# Altium PCB imu_board_r1.PcbDoc
Units mm, origin at the board's own origin, x right, y up, seen from the top; angles counter-clockwise.
Board outline 15 x 11 mm, 4 copper layers (Top Layer, Int1 (GND), Int2 (PWR), Bottom Layer), stack 1.369 mm thick; 23 components, 10 nets, 129 pads, 48 vias.
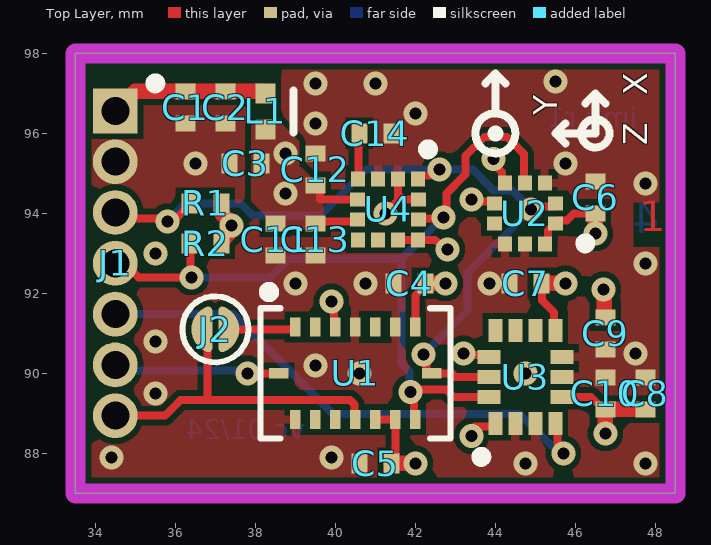
[diagram p0: Top Layer view]
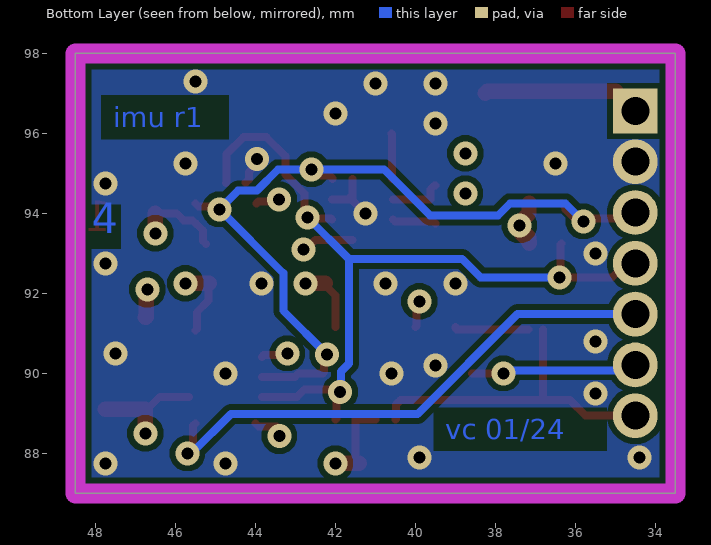
[diagram p1: Bottom Layer view, seen from below]
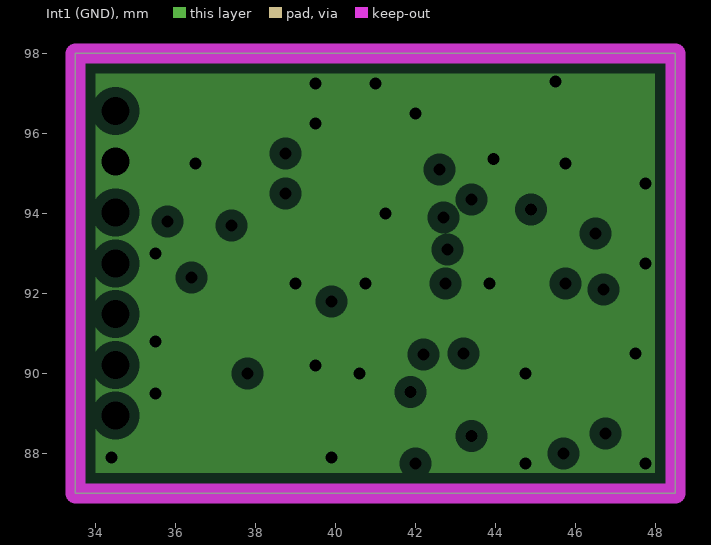
[diagram p2: Int1 (GND), clearances drawn from the general rule]
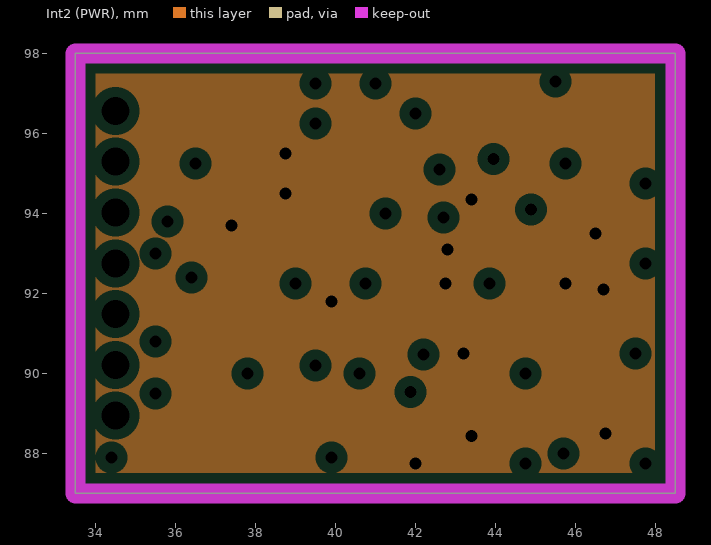
[diagram p3: Int2 (PWR), clearances drawn from the general rule]
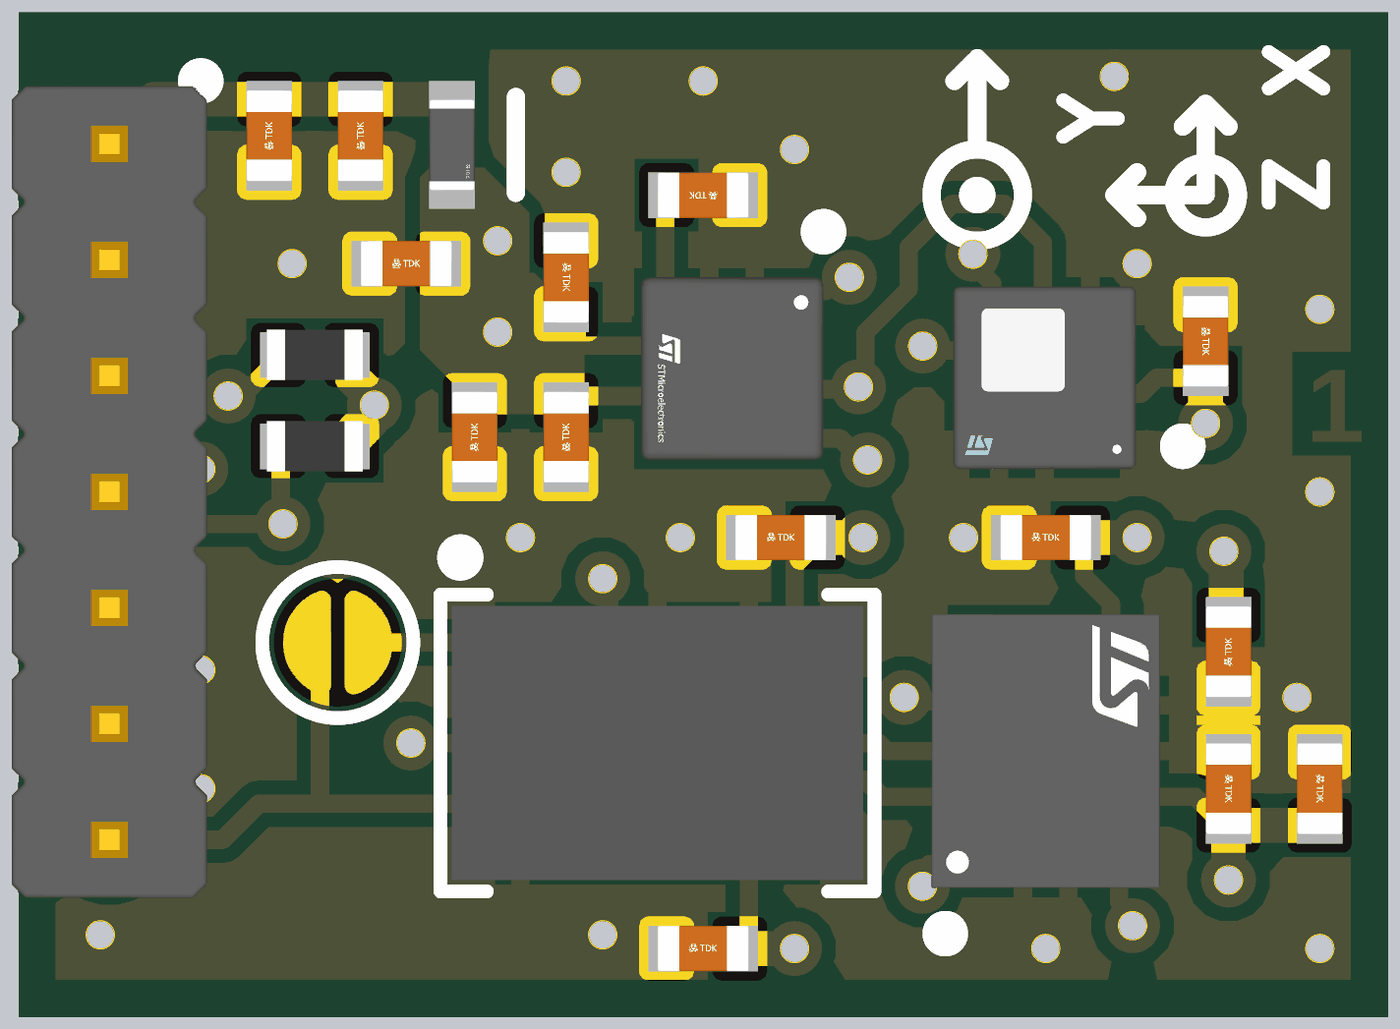
[diagram p4: 3D render of the assembled board from above, using the file's embedded part models]

## Layer stack, top to bottom
Top Solder: solder mask 0.0254, SM-001, Dk 4
Top Layer: signal copper 0.035
Dielectric 1: prepreg 0.1295, PP-017, Dk 4.3
Dielectric 2: prepreg 0.1295, PP-017, Dk 4.3
Int1 (GND): plane copper 0.035, net GND
Dielectric 3: core 0.7112, Core-039, Dk 4.8
Int2 (PWR): plane copper 0.035, net 3V3
Dielectric 4: prepreg 0.1295, PP-017, Dk 4.3
Dielectric 5: prepreg 0.1295, PP-017, Dk 4.3
Bottom Layer: signal copper 0.035
Bottom Solder: solder mask 0.0254, SM-001, Dk 4

## Board outline
33.5,87 33.5,98 48.5,98 48.5,87

## Design rules (kind name [scope] priority, off if disabled: settings)
Clearance [All] p1: gap=0.15 ignorepadtopadclearanceinfootprint=FALSE
MinimumSolderMaskSliver [All] p1: minsoldermaskwidth=0.1
PlaneClearance [All] p1: clearance=0.25
PlaneConnect [All] p1: planeconnectstyle=Direct reliefexpansion=0.508 reliefentries=4 reliefconductorwidth=0.254 reliefairgap=0.254
PolygonConnect PolygonConnect_1 [(HasFootprint('FP-HLGA-10L-DM00386636-MFG') OR HasFootprint('FP-LGA-14L-DM00249496-MFG') OR HasFootprint('FP-VFLGA-12-8365767-MFG') OR HasFootprint('QFN_BMI085_BOS'))] p1: connectstyle=Relief reliefconductorwidth=0.2 reliefentries=4 polygonreliefangle="90 Angle" airgapwidth=0.15
PolygonConnect [All] p2: connectstyle=Direct reliefconductorwidth=0.254 reliefentries=4 polygonreliefangle="90 Angle" airgapwidth=0.254
RoutingVias [All] p1: holewidth=0.3 width=0.6 viastyle="Through Hole" minholewidth=0.3 minwidth=0.6 maxholewidth=0.711 maxwidth=1.27
SilkToSilkClearance [All] p1: silktosilkclearance=0.1
SilkToSolderMaskClearance [IsPad] p1: minsilkscreentomaskgap=0.12 clearancetoexposedcopper=TRUE
SolderMaskExpansion SolderMaskExpansion_1 [IsVia] p1: expansion=0.102 istentingtop=TRUE
SolderMaskExpansion [All] p2: expansion=0.102 istentingtop=FALSE
Width [All] p1: maxlimit=1 minlimit=0.15 preferedwidth=0.254
25 further rules are at their usual default settings.

## Components (designator, comment, footprint, x,y, rotation, side; value= is the part's Value field where it differs from the comment)
C1 "10u" CAPC0402 36.25,96.65 r90 top value=10uF
C2 "10u" CAPC0402 37.25,96.65 r90 top value=10uF
C3 "10u" CAPC0402 37.75,95.25 r0 top value=10uF
C4 "1u" CAPC0402 41.85,92.25 r0 top value=1uF
C5 "100n" CAPC0402 41,87.75 r0 top
C6 "1u" CAPC0402 46.5,94.4 r270 top value=1uF
C7 "100n" CAPC0402 44.75,92.25 r0 top
C8 "1u" CAPC0402 47.75,89.5 r270 top value=1uF
C9 "100n" CAPC0402 46.75,91 r90 top
C10 "100n" CAPC0402 46.75,89.5 r270 top
C11 "1u" CAPC0402 38.5,93.35 r90 top value=1uF
C12 "100n" CAPC0402 39.5,95.1 r270 top
C13 "100n" CAPC0402 39.5,93.35 r90 top
C14 "100n" CAPC0402 41,96 r180 top
J1 "GRPB071VWVN-RC" FP-GRPB071VWVN-RC-MFG 34.5,92.75 r270 top
J2 "Solder Jumper" "Small Solder Jumper" 37,91.1 r0 top value=1
L1 "MLZ1005M1R0WT000" FP-MLZ1005-MFG 38.25,96.55 r270 top
R1 "2k2" RES0402 36.75,94.25 r0 top value=2.2kR
R2 "2k2" RES0402 36.75,93.25 r0 top value=2.2kR
U1 "BMI088" QFN_BMI085_BOS 40.5,90 r0 top
U2 "LPS22HHTR" FP-HLGA-10L-DM00386636-MFG 44.737,94 r180 top
U3 "LSM6DSRTR" FP-LGA-14L-DM00249496-MFG 44.75,89.912 r90 top
U4 "LIS3MDLTR" FP-VFLGA-12-8365767-MFG 41.317,94.1 r270 top

## Footprints (in the part's own frame and the unit in brackets; to place one, negate y for a bottom-side part, rotate by r counter-clockwise, add the part's x,y. Pads: shape width x height; smd on the part's side, far side on the other; paste and mask are expansions set on the pad)
CAPC0402 [mm]
  rect 0.4x0.5 smd paste+0: 1(-0.4,0) 2(0.4,0)
  body extent -0.5,-0.25 0.5,0.25, height 0.55
FP-GRPB071VWVN-RC-MFG [mm]
  rect 1.12x1.12 hole 0.7 paste-1000 mask+0: 1(-3.81,0)
  round 1.12 hole 0.7 paste-1000 mask+0: 2(-2.54,0) 3(-1.27,0) 4(0,0) 5(1.27,0) 6(2.54,0) 7(3.81,0)
  silkscreen extent -4.62,0.88 -4.38,1.13, body extent -4.79,-1.27 4.79,1.27, height 0.25
FP-HLGA-10L-DM00386636-MFG [mm]
  rect 0.375x0.35 smd paste+0 mask+0: 1(-0.763,0.25) 2(-0.763,-0.25) 6(0.763,-0.25) 7(0.763,0.25)
  rect 0.35x0.375 smd paste+0 mask+0: 3(-0.5,-0.763) 4(0,-0.763) 5(0.5,-0.763) 8(0.5,0.763) 9(0,0.763) 10(-0.5,0.763)
  silkscreen extent -1.64,0.63 -1.39,0.87, body extent -1,-1 1,1, height 0.8
FP-LGA-14L-DM00249496-MFG [mm]
  rect 0.575x0.35 smd paste-1000 mask+0: 1(-1.162,0.75) 2(-1.162,0.25) 3(-1.162,-0.25) 4(-1.162,-0.75) 8(1.162,-0.75) 9(1.162,-0.25) 10(1.162,0.25) 11(1.162,0.75)
  rect 0.35x0.575 smd paste-1000 mask+0: 5(-0.5,-0.913) 6(0,-0.913) 7(0.5,-0.913) 12(0.5,0.913) 13(0,0.913) 14(-0.5,0.913)
  silkscreen extent -2.12,0.97 -1.88,1.22, body extent -1.5,-1.25 1.5,1.25, height 0.86
FP-MLZ1005-MFG [mm]
  rect 0.5x0.5 smd paste+0 mask+0: 1(-0.45,0) 2(0.45,0)
  silkscreen extent -0.53,0.7 0.53,0.7, body extent -0.8,-0.38 0.8,0.38, height 0.25
FP-VFLGA-12-8365767-MFG [mm]
  rect 0.375x0.35 smd paste-0.03 mask+0: 1(-0.763,0.75) 2(-0.763,0.25) 3(-0.763,-0.25) 4(-0.763,-0.75) 7(0.763,-0.75) 8(0.763,-0.25) 9(0.763,0.25) 10(0.763,0.75)
  rect 0.35x0.375 smd paste-0.03 mask+0: 5(-0.25,-0.763) 6(0.25,-0.763) 11(0.25,0.763) 12(-0.25,0.763)
  silkscreen extent -1.62,0.88 -1.38,1.13, body extent -1,-1 1,1, height 1
QFN_BMI085_BOS [mil]
  rect 10x19 smd paste+0 mask+0: 1(-59.06,45.5) 2(-39.37,45.5) 3(-19.68,45.5) 4(0,45.5) 5(19.68,45.5) 6(39.37,45.5) 7(59.06,45.5) 9(59.06,-45.5) 10(39.37,-45.5) 11(19.68,-45.5) 12(0,-45.5) 13(-19.68,-45.5) 14(-39.37,-45.5) 15(-59.06,-45.5)
  rect 19x10 smd paste+0 mask+0: 8(75.25,0) 16(-75.25,0)
  silkscreen extent -94,-64 94,85, body extent -89,-59 89,59, height 40
RES0402 [mm]
  rect 0.4x0.5 smd paste+0: 1(-0.4,0) 2(0.4,0)
  body extent -0.53,-0.27 0.52,0.28, height 0.4
"Small Solder Jumper" [mm] "Small Solder Jumper (shortcut with a drop of tin if needed)"
  round 0.525 smd paste-5 mask+0: 1(-0.337,0) 2(0.337,0)
  oval 0.52x0.63 smd paste-5 mask+0: 1(-0.335,0) 2(0.335,0)
  oval 0.51x0.71 smd paste-5 mask+0: 1(-0.33,0) 2(0.33,0)
  oval 0.5x0.76 smd paste-5 mask+0: 1(-0.325,0) 2(0.325,0)
  oval 0.49x0.8 smd paste-5 mask+0: 1(-0.32,0) 2(0.32,0)
  oval 0.475x0.84 smd paste-5 mask+0: 1(-0.312,0) 2(0.312,0)
  oval 0.465x0.865 smd paste-5 mask+0: 1(-0.308,0) 2(0.308,0)
  oval 0.45x0.897 smd paste-5 mask+0: 1(-0.3,0) 2(0.3,0)
  oval 0.425x0.943 smd paste-5 mask+0: 1(-0.288,0) 2(0.288,0)
  oval 0.4x0.981 smd paste-5 mask+0: 1(-0.275,0) 2(0.275,0)
  oval 0.375x1.013 smd paste-5 mask+0: 1(-0.262,0) 2(0.262,0)
  oval 0.35x1.04 smd paste-5 mask+0: 1(-0.25,0) 2(0.25,0)
  oval 0.325x1.063 smd paste-5 mask+0: 1(-0.238,0) 2(0.238,0)
  oval 0.3x1.082 smd paste-5 mask+0: 1(-0.225,0) 2(0.225,0)
  oval 0.275x1.098 smd paste-5 mask+0: 1(-0.212,0) 2(0.212,0)
  oval 0.25x1.112 smd paste-5 mask+0: 1(-0.2,0) 2(0.2,0)
  oval 0.225x1.125 smd paste-5 mask+0: 1(-0.188,0) 2(0.188,0)
  oval 0.2x1.137 smd paste-5 mask+0: 1(-0.175,0) 2(0.175,0)
  silkscreen extent -0.82,-0.83 0.83,0.83

## Part data
C1 C2 C3: library part cap0402, "Ceramic Capacitor, Multilayer, Ceramic, 10V, 20% +Tol, 20% -Tol, X5R, 15% TC, 10uF, Surface Mount, 0402", Capacitor Type=Ceramic, Case/Package=0402, Manufacturer=Samsung, Manufacturer Part Number=CL05A106MP5NUNC, Max Operating Temperature=85°C, Min Operating Temperature=-55°C, Package Shape=Rectangular, Package Style=SMTMeter, Rated DC Voltage (URdc)=10V, Supplier Part Number=1276-1450-1-ND, Temperature Characteristics Code=X5R, Tolerance  (fill in as +-)=20%, Category="Ceramic Capacitors", ComponentLink1Description=https://datasheet.ciiva.com:443/pdfs/VipMasterIC/IC/SEMS/SEMS-S-A0008384515/SEMS-S-A0008872829-1.pdf?src-supplier=IHS+Markit, ComponentLink1URL=https://datasheet.ciiva.com:443/pdfs/VipMasterIC/IC/SEMS/SEMS-S-A0008384515/SEMS-S-A0008872829-1.pdf?src-supplier=IHS+Markit, Dielectric Material=Ceramic, Height=0.7mm, JESD-609 Code=e3, Length=1mm, Mounting Technology="Surface Mount", Multilayer=Yes, Packaging="Tape and Reel", Pins=2, Pricing="1=0.18, 10=0.115, 50=0.0726, 100=0.058, 500=0.04192, 1000=0.03708, 2500=0.03546, 5000=0.03224 (USD)", Reach SVHC Compliant=Yes, RoHS=Yes, RoHS Compliant=Yes, Stock=2505826, Supplier=Digikey, Terminal Finish=Nickel, Termination=Wraparound, Tolerance (fill in as +-)=20%, Width=0.5mm
C4 C6 C8 C11: library part cap0402, "Ceramic Capacitor, Multilayer, Ceramic, 25V, 20% +Tol, 20% -Tol, X5R, 15% TC, 1uF, Surface Mount, 0402", Capacitor Type=Ceramic, Case/Package=0402, Manufacturer="Taiyo Yuden", Manufacturer Part Number=TMK105BJ105MV-F, Max Operating Temperature=85°C, Min Operating Temperature=-55°C, Package Shape=Rectangular, Package Style=SMTMeter, Rated DC Voltage (URdc)=25V, Supplier Part Number=1843748, Temperature Characteristics Code=X5R, Tolerance  (fill in as +-)=20%, Category="Ceramic Capacitors", ComponentLink1Description=https://datasheet.ciiva.com:443/pdfs/VipMasterIC/IC/TAIY/TAIY-S-A0009103435/TAIY-S-A0009102669-1.pdf?src-supplier=IHS+Markit, ComponentLink1URL=https://datasheet.ciiva.com:443/pdfs/VipMasterIC/IC/TAIY/TAIY-S-A0009103435/TAIY-S-A0009102669-1.pdf?src-supplier=IHS+Markit, ComponentLink2Description=https://datasheet.ciiva.com/11596/tmk105bj105mv-f-ss-11596466.pdf?src-supplier=Avnet, ComponentLink2URL=https://datasheet.ciiva.com/11596/tmk105bj105mv-f-ss-11596466.pdf?src-supplier=Avnet, ComponentLink3Description=https://datasheet.ciiva.com/30154/128tmk105bj105mv-f-30154639.pdf?src-supplier=Onlinecomponents.com, ComponentLink3URL=https://datasheet.ciiva.com/30154/128tmk105bj105mv-f-30154639.pdf?src-supplier=Onlinecomponents.com, ComponentLink4Description=https://datasheet.ciiva.com/15922/tmk105bj105mv-f-pdf-15922317.pdf?src-supplier=Onlinecomponents.com, ComponentLink4URL=https://datasheet.ciiva.com/15922/tmk105bj105mv-f-pdf-15922317.pdf?src-supplier=Onlinecomponents.com, ComponentLink5Description=https://datasheet.ciiva.com/13404/mlcc-all-e-541559-13404206.pdf?src-supplier=Mouser, ComponentLink5URL=https://datasheet.ciiva.com/13404/mlcc-all-e-541559-13404206.pdf?src-supplier=Mouser, Dielectric Material=Ceramic, Height=0.5mm, JESD-609 Code=e3, Length=1mm, Mounting Technology="Surface Mount", Multilayer=Yes, Packaging="Tape and Reel", Pins=2, Pricing="200=0.05600, 600=0.05000, 1000=0.03900 (CHF)", Reach SVHC Compliant=Yes, RoHS=Yes, RoHS Compliant=Yes, Stock=2400, Supplier=Rs, Terminal Finish=Nickel, Termination=Wraparound, Tolerance (fill in as +-)=20%, Width=0.5mm
C5 C7 C9 C10 C12 C13 C14: library part cap0402, "Ceramic Capacitor, Multilayer, Ceramic, 50V, 10% +Tol, 10% -Tol, X5R, 15% TC, 0.1uF, Surface Mount, 0402", Capacitance=100nF, Capacitor Type=Ceramic, Manufacturer=Yageo, Manufacturer Part Number=CC0402KRX5R9BB104, Max Operating Temperature=85°C, Min Operating Temperature=-55°C, Negative Tolerance=10%, Package Shape=Rectangular, Package Style=SMTMeter, Rated DC Voltage (URdc)=50V, Supplier Part Number 1=3366442, Temperature Characteristics Code=X5R, Category="Ceramic Capacitors", ComponentLink1Description=https://datasheet.ciiva.com:443/pdfs/VipMasterIC/IC/YAGO/YAGO-S-A0006851646/YAGO-S-A0006851646-1.pdf?src-supplier=IHS+Markit, ComponentLink1URL=https://datasheet.ciiva.com:443/pdfs/VipMasterIC/IC/YAGO/YAGO-S-A0006851646/YAGO-S-A0006851646-1.pdf?src-supplier=IHS+Markit, ComponentLink2Description=http://www.yageo.com/documents/recent/UPY-GPHC_X5R_4V-to-50V_25.pdf?src-supplier=Digi-Key, ComponentLink2URL=http://www.yageo.com/documents/recent/UPY-GPHC_X5R_4V-to-50V_25.pdf?src-supplier=Digi-Key, ComponentLink3Description=http://www.yageo.com/documents/recent/UPY-GPHC_X5R_4V-to-50V_23.pdf?src-supplier=Digi-Key, ComponentLink3URL=http://www.yageo.com/documents/recent/UPY-GPHC_X5R_4V-to-50V_23.pdf?src-supplier=Digi-Key, Dielectric Material=Ceramic, Height=0.5mm, JESD-609 Code=e3, Length=1mm, Mount="Surface Mount", Multilayer=Yes, Number of Pins=2, Packaging="Tape and Reel", Positive Tolerance=10%, Pricing 1="10000=0.00890, 50000=0.00870 (CHF)", Reach SVHC Compliant=Yes, RoHS=Yes, RoHS Compliant=Yes, Size Code=0402, Stock 1=180000, Supplier 1=Farnell, Terminal Finish=Nickel, Termination=Wraparound, Width=0.5mm
J1: library part CMP-25680-000036-1, "CONN HEADER VERT 7POS 1.27MM", Package Quantity=1, Connector Type="Male Pin", Contact Mating Length=0.118inch, Contact Plating=Gold, Contact Type="Male Pin", Lead Free="Lead Free", Mount="Through Hole", Number of Positions=7, Number of Rows=1, Packaging=Bulk, Pitch=0.05inch, RoHS Compliant=Yes, Termination=Solder
J2: library part CMP-00005-5, Technology=SMT
L1: library part CMP-08253-000219-1, "Shielded Multilayer Inductor 1uH ±20% 450mA 455mΩ SMD 0402", Case Code (Imperial)=0402, Case Code (Metric)=1005, Current Rating=450mA, DC Resistance (DCR)=455mR, Inductance=1uH, Max Operating Temperature=125°C, Min Operating Temperature=-55°C, Package Quantity=10000, Saturation Current=100mA, Self Resonant Frequency=170MHz, Test Frequency=2MHz, Tolerance=20%, Case/Package=0402, Core Material=Ferrite, Height - Seated (Max)=0.022inch, Length=0.039inch, Mount="Surface Mount", Packaging="Tape and Reel", RoHS Compliant=Yes, Shielding=Shielded, Width=0.02inch
R1 R2: library part res0402, "Fixed Resistor, Metal Glaze/thick Film, 0.063W, 2200ohm, 50V, 1% +/-Tol, 100ppm/Cel, Surface Mount, 0402", Case/Package=0402, Manufacturer=Vishay, Manufacturer Part Number=CRCW04022K20FKED, Max Operating Temperature=155°C, Min Operating Temperature=-55°C, Package Height=0.35mm, Package Length=1mm, Package Shape=Rectangular, Package Style=SMTMeter, Package Width=0.5mm, Power=63mW, Rated Temperature=70°C, Resistor Type="FIXED RESISTOR", Supplier Part Number=2121643, Temperature Coefficient=100ppm/°C, Tolerance=1%, Working Voltage=50V, Category="Chip SMD Resistors", ComponentLink1Description=https://datasheet.ciiva.com:443/pdfs/VipMasterIC/IC/VISH/VISH-S-A0007266705/VISH-S-A0007266705-1.pdf?src-supplier=IHS+Markit, ComponentLink1URL=https://datasheet.ciiva.com:443/pdfs/VipMasterIC/IC/VISH/VISH-S-A0007266705/VISH-S-A0007266705-1.pdf?src-supplier=IHS+Markit, ComponentLink2Description=https://datasheet.ciiva.com/11811/0900766b80d98824-11811709.pdf?src-supplier=Rs, ComponentLink2URL=https://datasheet.ciiva.com/11811/0900766b80d98824-11811709.pdf?src-supplier=Rs, ComponentLink3Description=https://datasheet.ciiva.com/3256/dcrcwe3-3256341.pdf?src-supplier=Avnet, ComponentLink3URL=https://datasheet.ciiva.com/3256/dcrcwe3-3256341.pdf?src-supplier=Avnet, ComponentLink4Description=https://datasheet.ciiva.com/16209/dcrcwe3-16209157.pdf?src-supplier=Future+Electronics, ComponentLink4URL=https://datasheet.ciiva.com/16209/dcrcwe3-16209157.pdf?src-supplier=Future+Electronics, ComponentLink5Description=https://datasheet.ciiva.com/2464/dcrcwe3-2464486.pdf?src-supplier=Digi-Key, ComponentLink5URL=https://datasheet.ciiva.com/2464/dcrcwe3-2464486.pdf?src-supplier=Digi-Key, ComponentLink6Description=https://datasheet.ciiva.com/2464/dcrcwe3-2464487.pdf?src-supplier=Digi-Key, ComponentLink6URL=https://datasheet.ciiva.com/2464/dcrcwe3-2464487.pdf?src-supplier=Digi-Key, ComponentLink7Description=https://datasheet.ciiva.com/2464/dcrcwe3-2464488.pdf?src-supplier=Digi-Key, ComponentLink7URL=https://datasheet.ciiva.com/2464/dcrcwe3-2464488.pdf?src-supplier=Digi-Key, ComponentLink8Description=https://datasheet.ciiva.com/5541/dcrcwe3-109170-5541416.pdf?src-supplier=Mouser, ComponentLink8URL=https://datasheet.ciiva.com/5541/dcrcwe3-109170-5541416.pdf?src-supplier=Mouser, ComponentLink9Description=https://datasheet.ciiva.com/26316/fld-crcw-e3-data-en-26316650.pdf?src-supplier=Distrelec, ComponentLink9URL=https://datasheet.ciiva.com/26316/fld-crcw-e3-data-en-26316650.pdf?src-supplier=Distrelec, ComponentLink10Description=https://datasheet.ciiva.com/7777/1697337-7777227.pdf?src-supplier=Element14, ComponentLink10URL=https://datasheet.ciiva.com/7777/1697337-7777227.pdf?src-supplier=Element14, ComponentLink11Description=https://datasheet.ciiva.com/7777/1697337-7777228.pdf?src-supplier=Element14, ComponentLink11URL=https://datasheet.ciiva.com/7777/1697337-7777228.pdf?src-supplier=Element14, ComponentLink12Description=https://datasheet.ciiva.com/16778/70201119-16778943.pdf?src-supplier=Allied+Electronics, ComponentLink12URL=https://datasheet.ciiva.com/16778/70201119-16778943.pdf?src-supplier=Allied+Electronics, Construction=Chip, JESD-609 Code=e3, Mounting Technology="Surface Mount", Packaging="Tape and Reel", Pins=2, Pricing="10000=0.00400, 50000=0.00390, 100000=0.00380 (CHF)", Reach SVHC Compliant=Yes, Reference Standard=AEC-Q200, RoHS=Yes, RoHS Compliant=Yes, Stock=30000, Supplier=Farnell, Technology="METAL GLAZE/THICK FILM", Terminal Finish=Nickel, Termination=Wraparound
U1: "No Description Available", Mfr_Name="Bosch Sensortec", Copyright="Copyright (C) 2024 Ultra Librarian. All rights reserved.", Manufacturer_Part_Number=BMI088, RefDes=RefDes, Type=DEV
U2: library part CMP-12182-000001-1, "CONSUMER MEMS", Manufacturer=STMicroelectronics, Max Supply Voltage=3.7V, Min Supply Voltage=1.7V, Operating Supply Current=4-12uA, Package=HLGA-10L-DM00386636, Temperature="-40°C to +85°C", Temperature Range High=+85°C, Temperature Range Low=-40°C, Automotive=No, Category=IC, ComponentLink2Description=Datasheet, ComponentLink2URL=https://www.st.com/resource/en/datasheet/lps22hh.pdf, Device Class L1=Sensors, Device Class L2="Pressure Sensors", Device Class L3=unset, Digikey Description="CONSUMER MEMS", Footprint Url=https://www.st.com/content/ccc/resource/technical/document/technical_note/73/17/9c/16/dd/96/4a/01/CD00134799.pdf/files/CD00134799.pdf/jcr:content/translations/en.CD00134799.pdf, Height=0.8mm, Lead Free=Yes, Manufacturer Part Number=LPS22HHTR, Octopart=https://octopart.com/lps22hhtr-stmicroelectronics-94834025, Port Style="No Port", RoHS=TRUE, Sensor Output=I2C,SPI
U3: library part CMP-12177-000003-1, "INEMO INERTIAL MODULE: 3D ACCELE", Manufacturer=STMicroelectronics, Max Supply Voltage=3.6V, Min Supply Voltage=1.62V, Operating Supply Current=360-1200uA, Package=LGA-14L-DM00249496, Temperature="-40°C to +85°C", Temperature Range High=+85°C, Temperature Range Low=-40°C, Accel Range=2/4/8/16g, Automotive=No, Category=IC, ComponentLink2Description=Datasheet, ComponentLink2URL=https://www.st.com/resource/en/datasheet/lsm6dsr.pdf, Device Class L1=Sensors, Device Class L2="Motion Sensors", Device Class L3="Inertial Measurement Units (IMUs)", Digikey Description="INEMO INERTIAL MODULE: 3D ACCELE", Footprint Url=https://www.st.com/content/ccc/resource/technical/document/technical_note/73/17/9c/16/dd/96/4a/01/CD00134799.pdf/files/CD00134799.pdf/jcr:content/translations/en.CD00134799.pdf, Gyro Range=125/250/500/1000/2000/4000°/s, Height=0.86mm, Lead Free=Yes, Manufacturer Part Number=LSM6DSRTR, Mouser Description="In a Pack of 2, LSM6DSRTR STMicroelectronics, 3-Axis Accelerometer, Gyroscope, 14-Pin LGA", Octopart=https://octopart.com/lsm6dsrtr-stmicroelectronics-93180177, RoHS=TRUE, Sensor Output=I2C,SPI, Sensor Type=Temperature,Accelerometer,Gyroscope
U4: library part CMP-2000-07463-2, "SENSOR MR I2C/SPI 12LGA", Manufacturer=STMicroelectronics, Max Supply Voltage=3.6V, Min Supply Voltage=1.71V, Operating Supply Current=40-270uA, Package=VFLGA-12-8365767, Temperature="-40°C to +85°C", Temperature Range High=+85°C, Temperature Range Low=-40°C, Automotive=No, Category=IC, ComponentLink2Description=Datasheet, ComponentLink2URL=https://www.st.com/resource/en/datasheet/lis3mdl.pdf, Device Class L1=Sensors, Device Class L2="Magnetic Sensors", Device Class L3=unset, Digikey Description="SENSOR MR I2C/SPI 12LGA", Footprint Url=https://www.st.com/content/ccc/resource/technical/document/technical_note/73/17/9c/16/dd/96/4a/01/CD00134799.pdf/files/CD00134799.pdf/jcr:content/translations/en.CD00134799.pdf, Height=1mm, Lead Free=Yes, Manufacturer Part Number=LIS3MDLTR, Mouser Description="Board Mount Hall Effect / Magnetic Sensors Ultra Lo-Pwr Hi Perf 3-Axis 1.9-3.6V", Octopart=https://octopart.com/lis3mdltr-stmicroelectronics-29403125, RoHS=TRUE, Sensing Method=Magnetic, Sensor Output=I2C,SPI

## Via types
v1: diameter 0.6, hole 0.3, Top Layer to Bottom Layer, tented both sides, 48 vias

## Nets (pads, with @x,y where several pads share a name; then routed paths per layer and width w, separated by ;. In a path a pad name is that pad's centre, name@x,y a point inside that pad or via, vN(x,y) a via of type N, cw(c..) or ccw(c..) an arc to the next point about the centre after c; other vN are vias at no path point)
3V3: C3.2 C4.2 C5.2 C6.2 C7.2 C8.2 C9.2 C10.2 C11.2 C12.2 C13.2 L1.2 R1.2 R2.2 U1.3 U1.7 U1.10 U1.11 U2.1 U2.6 U2.10 U3.1 U3.5 U3.8 U3.12 U4.5 U4.6 U4.9 U4.10 | length 19.9
  Top Layer w0.2: C13.2 39.55,93.8 40.505,93.8 U4.6 ; C12.2 39.517,94.7 39.617,94.6 39.617,94.35 U4.5 ; v1(39.9,91.8) 39.973,91.727 39.973,91.183 U1.3 ; U1.11 U1.10 41.5,87.9 41.4,87.8 C5.2 ; U4.9 U4.10 42.498,93.337 42.735,93.1 v1(42.8,93.1) ; U1.7 42,91.95 42.25,92.2 C4.2 ; v1(43.2,90.5) 43.244,90.456 43.794,90.456 U3.12 ; v1(43.4,88.431) 43.475,88.506 43.475,88.675 43.925,88.675 U3.1 ; v1(43.403,94.347) 43.451,94.299 43.926,94.299 U2.6 ; C7.2 45.172,92.228 45.172,91.817 45.464,91.526 45.464,91.111 U3.8 ; U2.10 45.312,93.313 45.312,93.575 45.487,93.75 U2.1 45.575,93.825 45.791,93.825 45.966,94 C6.2 ; U3.5 46.388,89.413 46.7,89.1 C10.2
  Top Layer w0.381: R2.2 37.159,93.259 37.159,93.4 37.4,93.641 v1(37.4,93.7) 37.358,93.658 37.358,93.508 R2.2@37.15,93.3 ; R1.2 37.159,94.24 37.159,94 37.384,93.775 v1@37.384,93.716 ; C5.2 v1(42,87.75) ; C4.2 v1(42.75,92.25) ; C7.2 v1(45.75,92.25) ; v1(46.5,93.5) C6.2 ; v1(46.7,92.1) 46.725,92.075 46.725,91.409 46.735,91.4 C9.2 ; v1(46.75,88.5) C10.2 C8.2
  other v1: 38.75,94.5 38.75,95.5
GND: C1.1 C2.1 C3.1 C4.1 C5.1 C6.1 C7.1 C8.1 C9.1 C10.1 C11.1 C12.1 C13.1 C14.1 J1.2 U1.4 U1.6 U1.15 U2.3 U2.5 U2.8 U2.9 U3.2 U3.3 U3.6 U3.7 U4.2 U4.3 U4.12 | length 2.3
  Top Layer w0.2: v1(41.25,94) 41.567,94.317 41.567,94.467 ; U4.2 41.567,94.467 ; U4.12 41.684,94.35 41.567,94.467 ; v1(43.952,95.353) 43.952,95.246 44.162,95.036 44.162,94.85 44.239,94.774 U2.5@44.249,94.774
  other v1: 44.75,87.75 47.75,87.75 34.4,87.9 39.9,87.9 35.5,89.5 40.6,90 44.75,90 39.5,90.2 47.5,90.5 35.5,90.8 39,92.25 40.75,92.25 43.85,92.25 47.75,92.75 35.5,93 47.75,94.75 36.5,95.25 45.75,95.25 39.5,96.25 42,96.5 39.5,97.25 41,97.25 45.5,97.3
IMU_0_INT1: J1.5 U3.4 | length 13.5
  Top Layer w0.2: U3.4 45.554,88.696 45.554,88.254 45.7,88.108 v1(45.7,88)
  Bottom Layer w0.2: J1.5 37.442,91.48 39.941,88.981 44.61,88.981 45.592,88 v1(45.7,88)
IMU_1_INT_A: J1.6 U1.16 | length 4.2
  Top Layer w0.2: v1(37.8,90) U1.16
  Bottom Layer w0.2: J1.6 34.633,90.077 37.723,90.077 v1(37.8,90)
IMU_1_INT_G: J1.7 J2.1 U1.12 | length 8.4
  Top Layer w0.2: J1.7 35.74,88.94 36.136,89.336 36.746,89.336 ; J2.1@36.805,91.095 36.805,89.395 36.746,89.336 ; U1.12 40.482,88.863 40.482,89.218 40.364,89.336 36.746,89.336
NetC1_2: C1.2 C2.2 J1.1 L1.1 | length 4
  Top Layer w0.381: J1.1 34.99,97.05 C1.2 38.2,97.05 L1.1
NetC14_2: C14.2 U4.4 | length 1.2
  Top Layer w0.2: U4.4 40.584,94.879 40.584,95.984 C14.2
NetJ2_2: J2.2 U1.1 | length 1.9
  Top Layer w0.2: J2.2@37.175,91.1 37.187,91.1 37.2,91.1 37.212,91.1 37.225,91.1 37.237,91.1 37.25,91.1 37.262,91.1 37.275,91.1 37.287,91.1 37.3,91.1 37.307,91.1 37.312,91.1 37.32,91.1 37.325,91.1 37.33,91.1 J2.2@37.335,91.1 ; J2.2@37.337,91.1 J2.2@37.335,91.1 ; U1.1 39,91.127 38.973,91.1 J2.2@37.335,91.1
SCL: J1.3 R1.1 U1.8 U2.2 U3.13 U4.1 | length 20.6
  Top Layer w0.2: J1.3 34.643,93.877 35.723,93.877 v1(35.8,93.8) 35.877,93.877 36.027,93.877 36.25,94.1 36.25,94.15 R1.1 ; U4.1 42.067,94.875 42.142,94.95 42.341,94.95 42.492,95.1 v1(42.6,95.1) ; v1(42.205,90.471) 42.282,90.395 42.282,90.027 42.309,90 U1.8 42.922,90 43.01,89.912 U3.13 ; v1(44.898,94.101) 44.973,94.175 45.425,94.175 U2.2
  Bottom Layer w0.2: v1(35.8,93.8) 36.25,94.25 37.628,94.25 37.928,93.95 39.635,93.95 40.785,95.1 v1(42.6,95.1) 43.428,95.1 43.957,94.571 44.428,94.571 v1(44.898,94.101) 43.3,92.503 43.3,91.566 v1(42.205,90.471)
SDA: J1.4 R2.1 U1.9 U2.4 U3.14 U4.11 | length 20.9
  Top Layer w0.2: J1.4 34.727,92.75 35.077,92.4 v1(36.4,92.4) ; R2.1 36.375,93.225 36.375,92.517 v1@36.4,92.492 ; v1(41.877,89.531) 41.958,89.45 41.973,89.45 41.973,88.871 U1.9 ; v1@42,89.491 42,89.6 42.769,89.6 42.956,89.413 U3.14 ; U4.11 42.105,93.875 42.675,93.875 v1(42.7,93.9) 42.777,93.977 42.777,94.499 43.251,94.973 43.251,95.429 43.725,95.903 44.297,95.903 44.719,95.481 44.719,94.781 U2.4
  Bottom Layer w0.2: v1(36.4,92.4) 38.372,92.4 38.827,92.855 41.655,92.855 ; v1(41.877,89.531) 41.856,89.553 41.856,90.043 41.655,90.243 41.655,92.855 ; v1(42.7,93.9) 41.655,92.855
pads on no net: U1.2 U1.5 U1.13 U1.14 U2.7 U3.9 U3.10 U3.11 U4.7 U4.8

## Polygon pours and split planes (outlines as drawn)
GND on Top Layer "GND_L01_P002" (solid, pour order 2): 33.5,98 48.5,98 48.5,87 33.5,87
3V3 on Top Layer "3V3_L01_P000" (solid, pour order 0): 38,96.3 37.9,96.2 37.9,94.3 38.3,93.9 38.3,93.6 39.7,93.6 39.7,94.8 39.5,94.8 39.1,95.2 39.1,95.8 38.6,96.3
GND on Bottom Layer "GND_L04_P001" (solid, pour order 1): 33.5,98 48.5,98 48.5,87 33.5,87
3V3 on Int2 (PWR) (split plane): 47.99,94.047 47.5,94.047 47.5,93.2 47.99,93.2 47.99,87.51 34.01,87.51 34.01,97.49 47.99,97.49
GND on Int1 (GND) (split plane): 47.99,94.033 47.5,94.033 47.5,93.2 47.99,93.2 47.99,87.51 34.01,87.51 34.01,97.49 47.99,97.49

## Keep-outs
Keep-Out Layer:
  the board outline again, w0.5

## Other copper
Top Layer:
  text "1" at 47.6,93.3 h1.3
Bottom Layer:
  text "imu r1" at 47.55,96.15 h0.5
  text "4" at 48.092,93.25 h1.3
  text "vc 01/24" at 39.25,88.35 h0.5
Int1 (GND) (plane layer: these items are gaps in the copper):
  text "2" at 47.5,93.2 h1.3
Int2 (PWR) (plane layer: these items are gaps in the copper):
  text "3" at 47.5,93.214 h1.3

## Silkscreen, mask and mechanical layers (free items; w line width, h text height)
Top Overlay:
  circle w0.4: c44,96 r0
  circle w0.2: c44,96 r0.5
  circle w0.2: c46.5,96 r0.354
  lines w0.2: 43.75,97.25 44,97.5 ; 44,96.5 44,97.5 ; 44.25,97.25 44,97.5 ; 45.625,95.875 45.75,95.75 ; 45.75,96.25 45.5,96 ; 46.25,96.75 46.5,97 ; 46.75,96.75 46.5,97 ; 45.5,96 45.75,95.75 ; 45.5,96 46.5,96 46.5,97 ; 45.75,95.75 45.75,95.75 ; 46.5,97 46.5,97
  text "X" at 47.8,96.95 h0.6 r90
  text "Y" at 45.55,96.45 h0.6 r90
  text "Z" at 47.8,95.7 h0.6 r90
Top Solder:
  rectangle: 46.4,90.2 47.1,90.3

## Dimensions
49.5,98 to 49.5,87 on Mechanical 1
33.5,99.5 to 48.5,99 on Mechanical 1